# Altium PCB ET-master.PcbDoc (part 2 of 2)
Units mil, origin at the board's own origin, x right, y up, seen from the top; angles counter-clockwise.
Board outline 6299 x 3937 mil, 4 copper layers (TopLayer, agnd, power, BottomLayer); 134 components, 185 nets, 734 pads, 100 vias.
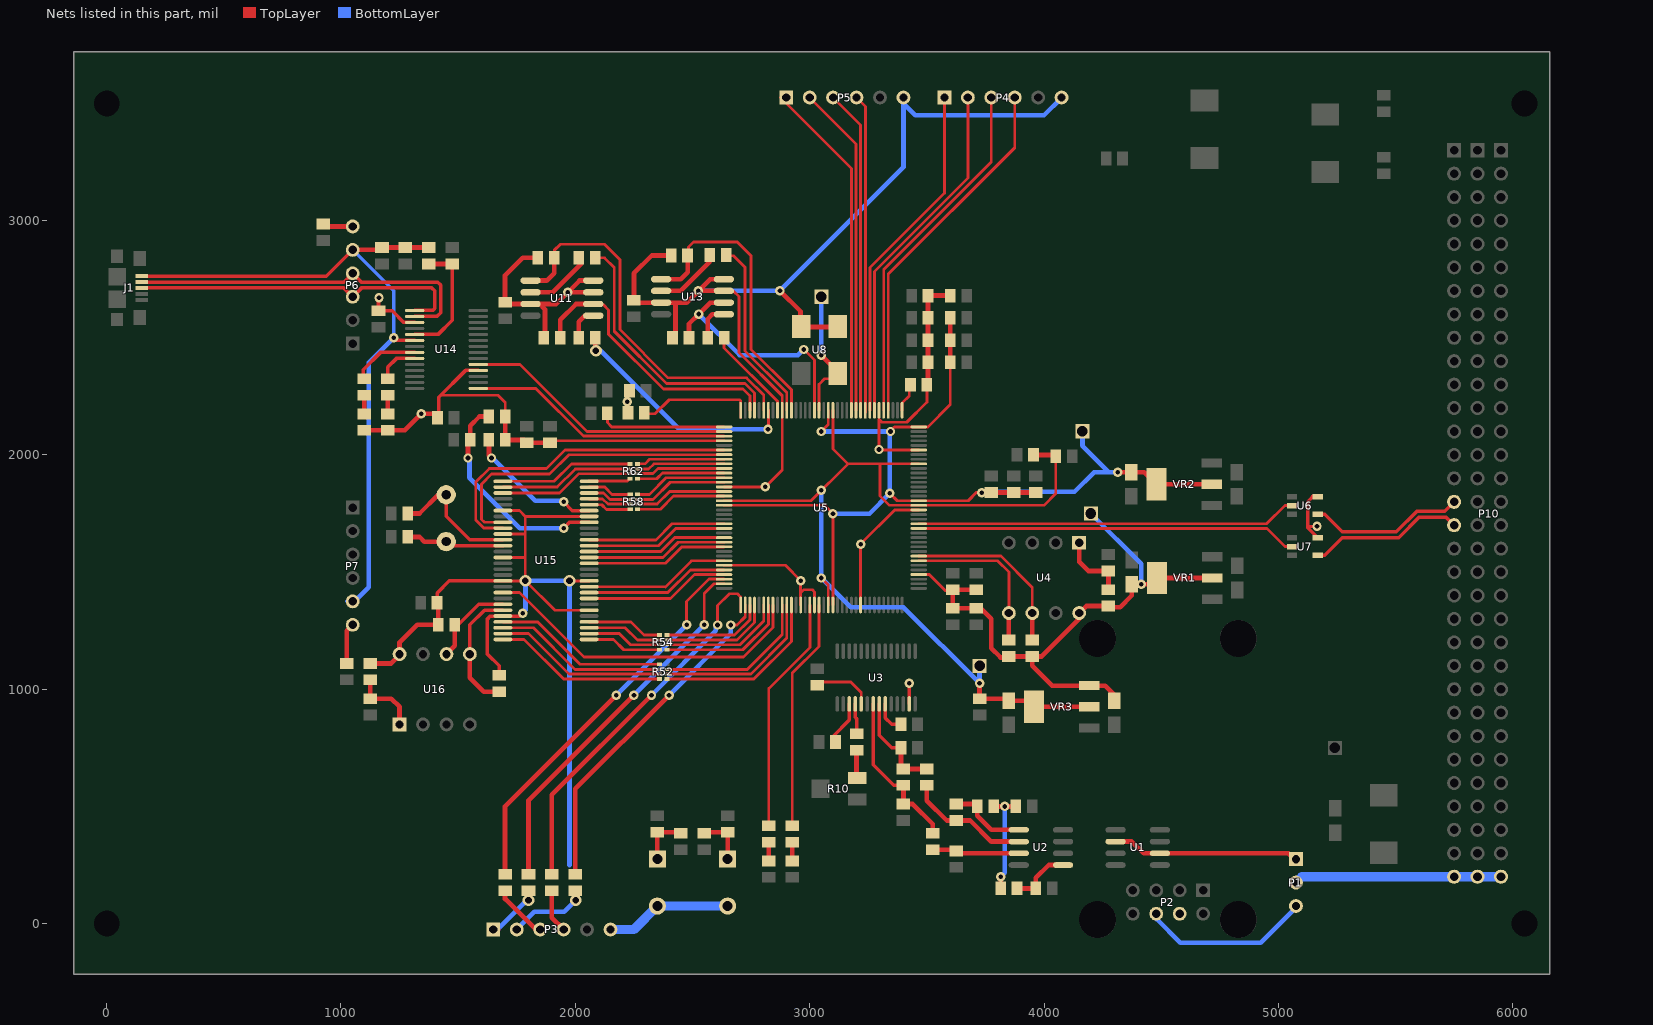
[diagram p4: the nets of this part, all layers, seen from the top]

## Via types
v1: diameter 40, hole 20, TopLayer to BottomLayer, 89 vias
v2: diameter 50, hole 28, TopLayer to BottomLayer, 10 vias
v3: diameter 40, hole 22, TopLayer to BottomLayer, 1 vias

## Nets (pads, with @x,y where several pads share a name; then routed paths per layer and width w, separated by ;. In a path a pad name is that pad's centre, name@x,y a point inside that pad or via, vN(x,y) a via of type N, cw(c..) or ccw(c..) an arc to the next point about the centre after c; other vN are vias at no path point) (continued)
FD1: R52.3 U5.118 | length 679.5
  TopLayer w12: R52.3@2390.75,1084.84 2733.84,1084.84 2882.68,1233.68 U5.118@2882.68,1359.65
FD2: R52.2 U5.119 | length 716.4
  TopLayer w12: R52.2@2390.75,1065.16 2749.16,1065.16 2902.36,1218.36 U5.119@2902.36,1359.65
FD3: R52.1 U5.120 | length 753.4
  TopLayer w12: R52.1@2390.75,1043.5 2761.5,1043.5 2922.05,1204.05 U5.120@2922.05,1359.65
FD4: R54.1 U5.115 | length 560.1
  TopLayer w12: R54.1@2390.75,1168.5 2714.5,1168.5 2823.62,1277.62 U5.115@2823.62,1359.65
FD5: R54.2 U5.114 | length 523.1
  TopLayer w12: R54.2@2390.75,1190.16 2702.16,1190.16 2803.94,1291.94 U5.114@2803.94,1359.65
FD6: R54.3 U5.112 | length 479.8
  TopLayer w12: R54.3@2390.75,1209.84 2689.84,1209.84 2764.57,1284.57 U5.112@2764.57,1359.65
FD7: R54.4 U5.111 | length 444
  TopLayer w12: R54.4@2390.75,1231.5 2679.5,1231.5 2744.88,1296.88 U5.111@2744.88,1359.65
FD8: R58.1 U5.88 | length 392.2
  TopLayer w12: R58.1@2265.75,1768 2363,1768 2419.21,1824.21 U5.88@2634.65,1824.21
FD9: R58.2 U5.87 | length 391.2
  TopLayer w12: R58.2@2265.75,1790.16 2349.16,1790.16 2402.9,1843.9 U5.87@2634.65,1843.9
FD10: R58.3 U5.85 | length 399.3
  TopLayer w12: R58.3@2265.75,1809.84 2331.84,1809.84 2405.27,1883.27 U5.85@2634.65,1883.27
FD11: R58.4 U5.84 | length 398.7
  TopLayer w12: R58.4@2265.75,1831 2316,1831 2387.95,1902.95 U5.84@2634.65,1902.95
FD12: R62.1 U5.83 | length 379.9
  TopLayer w12: R62.1@2264.75,1898.5 2347.5,1898.5 2371.64,1922.64 U5.83@2634.65,1922.64
FD13: R62.4 U5.80 | length 378.1
  TopLayer w12: R62.4@2264.75,1962 2297,1962 2316.69,1981.69 U5.80@2634.65,1981.69
FD14: R62.3 U5.81 | length 378.1
  TopLayer w12: R62.3@2265.75,1939.84 2312.84,1939.84 2335.01,1962.01 U5.81@2634.65,1962.01
FD15: R62.2 U5.82 | length 379.1
  TopLayer w12: R62.2@2264.75,1920.16 2331.16,1920.16 2353.32,1942.32 U5.82@2634.65,1942.32
FIFOAD0: U5.97 U15.44 | length 600.3
  TopLayer w12: U15.44@2059.06,1587.5 2364.5,1587.5 2424.05,1647.05 U5.97@2634.65,1647.05
FIFOAD1: U5.95 U15.45 | length 606.2
  TopLayer w12: U15.45@2059.06,1612.5 2354.5,1612.5 2428.42,1686.42 U5.95@2634.65,1686.42
FLAGA: U5.105 U15.36 | length 617.9
  TopLayer w12: U15.36@2059.06,1387.5 2406.5,1387.5 2508.57,1489.57 U5.105@2634.65,1489.57
FLAGB: U5.104 U15.37 | length 615.7
  TopLayer w12: U15.37@2059.06,1412.5 2394.5,1412.5 2491.25,1509.25 U5.104@2634.65,1509.25
FLAGC: U5.102 U15.38 | length 621.6
  TopLayer w12: U15.38@2059.06,1437.5 2383.5,1437.5 ; 2384.5,1436.5 2495.62,1547.62 ; 2494.62,1548.62 U5.102@2634.65,1548.62
GCLK: pad.0@3050,2675 U5.55 U8.3 | length 536.8
  TopLayer w12: U5.55@3040.16,2190.35 3040.16,2301.16 3064,2325 U8.3@3100,2325
  TopLayer w20: v1(3050,2425) 3120.74,2354.26 U8.3@3120.74,2348
  BottomLayer w20: v1(3050,2425) pad.0@3050,2675
GCLK_N: P10.C17 U7.4 | length 664.1
  TopLayer w15: U7.4@5168.13,1571.58 5198,1571.58 5273,1646.58 5513.36,1646.58 5601.77,1735 5715,1735 P10.C17@5750,1700
GCLK_P: P10.C16 U6.4 | length 666.1
  TopLayer w15: U6.4@5168.13,1746.58 5198,1746.58 5273,1671.58 5503,1671.58 5591.42,1760 5710,1760 P10.C16@5750,1800
GCLKOUT_N: U5.14 U7.2 | length 1605.4
  TopLayer w12: U5.14@3485,1686.42 4950,1686.42 ; 4949.58,1686.42 4950,1686 4950.98,1686 5028,1608.98 U7.2@5057.9,1608.98
GCLKOUT_P: U5.15 U6.2 | length 1624.8
  TopLayer w12: U5.15@3465.35,1706.1 4950.12,1706.1 5028,1783.98 U6.2@5057.9,1783.98
IFCLK: U5.116 U15.20 | length 1415.1
  TopLayer w12: U15.20@1690.94,1412.5 1761.5,1412.5 2037,1137 2717,1137 2843.31,1263.31 U5.116@2843.31,1359.65
J1: P4.4 U5.40 | length 1558.3
  TopLayer w12: U5.40@3335,2190.35 3335,2771 3875,3311 P4.4@3875,3525
J2: P4.3 U5.41 | length 1524.8
  TopLayer w12: U5.41@3316,2190.35 3316,2791 3775,3250 P4.3@3775,3525
J3: P4.2 U5.43 | length 1499.9
  TopLayer w12: U5.43@3276,2190.35 3276,2783 3675,3182 P4.2@3675,3525
J4: P4.1 U5.44 | length 1466.4
  TopLayer w12: U5.44@3257,2190.35 3257,2799 3575,3117 P4.1@3575,3525
J5: P5.4 U5.45 | length 1358.2
  TopLayer w12: P5.4@3200,3525 3237.64,3487.36 U5.45@3237.64,2182.35
J6: P5.3 U5.46 | length 1383.1
  TopLayer w12: P5.3@3100,3525 3217,3408 U5.46@3217,2190.35
J7: P5.2 U5.47 | length 1416.7
  TopLayer w12: P5.2@3000,3525 3198,3327 U5.47@3198,2190.35
J8: P5.1 U5.48 | length 1460.2
  TopLayer w12: P5.1@2875,3525 3178,3222 U5.48@3177.95,2190.35
LED1: R31.1 U5.126 | length 985.5
  TopLayer w12: R31.1@2925.75,421.55 2925.75,1068.75 3040.16,1183.16 U5.126@3040.16,1359.65
LED2: R32.1 U5.124 | length 1014.8
  TopLayer w12: R32.1@2825.75,417.35 2825.75,1003.75 3000.79,1178.79 U5.124@3000.79,1359.65
NetC1_1: C1.1 R4.2 R5.2 | length 452.1
  TopLayer w20: R4.2@3785.04,500 v1(3832.48,500) C1.1@3879.92,500 ; R5.2@3814.96,150 v1(3814.96,200)
  BottomLayer w20: v1(3814.96,200) 3832.48,217.52 v1(3832.48,500)
NetC2_1: C2.1 R6.1 R8.2 U3.21 | length 705.6
  TopLayer w15: U3.21@3271.2,937.8 3271.2,677.22 3358.46,589.96 C2.1@3400,589.96
  TopLayer w20: C2.1@3400,589.96 R8.2@3400,510.04 3439.96,510.04 3525,425 R6.1@3525,385.04
NetC2_2: C2.2 R2.1 R3.1 U3.22 | length 429.7
  TopLayer w15: U3.22@3296.8,937.8 3296.8,803.2 3350,750 R2.1@3389.96,750
  TopLayer w20: C2.2@3389.96,670.08 R2.1@3389.96,750 ; C2.2@3400,660.04 R3.1@3500,660.04
NetC3_1: C3.1 R5.1 U2.5 | length 264
  TopLayer w20: R5.1@3885.04,150 C3.1@3964.96,150 3964.96,194.76 4020.2,250 U2.5@4081.42,250
NetC4_2: C4.2 U3.17 | length 166.3
  TopLayer w15: C4.2@3100,800 3168.84,868.84 U3.17@3168.84,937.8
NetC5_1: C5.1 U3.19 | length 257.9
  TopLayer w12: C5.1@3029,1031 3175,1031 3220.02,985.98 U3.19@3220.02,937.8
NetC6_2: C6.2 U3.23 | length 139.2
  TopLayer w15: U3.23@3322.39,937.8 3322.39,877.61 3350,850 C6.2@3389.96,850
NetC53_1: C53.1 R46.2 U15.49 | length 925.7
  TopLayer w15: v1(1950,1687.5) 1950,1700 1956.25,1693.75 1975,1712.5 U15.49@2059.06,1712.5
  TopLayer w20: v1(1542,1987) C53.1@1542,2049 ; C53.1@1551.04,2064 1551.04,2124.04 1591,2164 R46.2@1630.96,2164
  BottomLayer w20: v1@1548,1987 1548,1903 1763.5,1687.5 v1(1950,1687.5)
NetC54_1: C54.1 U15.12 Y1.1 | length 417
  TopLayer w15: Y1.1@1449,1630 1467.5,1611.5 U15.12@1692.94,1611.5
  TopLayer w20: C54.1@1284.25,1665.75 C54.1@1292.32,1665.75 ; C54.1@1300,1650 1335.04,1650 1355.04,1630 Y1.1@1449,1630
NetC55_1: C55.1 U15.11 Y1.2 | length 568.4
  TopLayer w15: Y1.2@1449,1830 1449,1738 1549.5,1637.5 U15.11@1690.94,1637.5
  TopLayer w20: C55.1@1289.35,1750 1335.04,1750 1415.04,1830 Y1.2@1449,1830
NetD2_A: D2.A R31.2 | length 79.9
  TopLayer w20: D2.A@2925.75,267.35 R31.2@2925.75,347.28
NetD3_A: D3.A R32.2 | length 79.9
  TopLayer w20: D3.A@2825.75,267.35 R32.2@2825.75,347.28
NetD4_A: D4.A R42.1 | length 79.9
  TopLayer w20: R42.1@1099.61,2177.89 D4.A@1099.61,2257.81
NetD4_K: D4.K U14.22 | length 291.2
  TopLayer w12: D4.K@1095.21,2331.2 D4.K@1101.61,2324.8
  TopLayer w15: D4.K@1095.21,2331.2 1095.21,2364.11 1168.31,2437.2 U14.22@1314.17,2437.2
NetD5_A: D5.A R43.1 | length 79.9
  TopLayer w20: R43.1@1199.61,2174.8 D5.A@1199.61,2254.72
NetD5_K: D5.K U14.23 | length 174.2
  TopLayer w15: D5.K@1199.61,2324.8 1199.61,2369.64 ; 1200,2375 1236.61,2411.61 U14.23@1314.17,2411.61
NetP1_1: P1.1 U1.2 U1.6 | length 853.5
  TopLayer w20: U1.2@4305.51,350 4375,350 4425,300 U1.6@4525,300 ; U1.6@4475,300 5043,300 P1.1@5075,268
NetP3_1: P3.1 R29.1 | length 223.7
  TopLayer w20: P3.1@1650,-25 P3.1@1669.69,-25
  BottomLayer w20: P3.1@1650,-25 1669.69,-25 v2@1800,105.31
  other v2: 1800,100
NetP3_2: P3.2 R28.1 | length 303.8
  BottomLayer w20: P3.2@1750,-25 1825,50 1952,50 v2(2002,100)
NetP3_3: P3.3 R27.1 | length 238.6
  TopLayer w20: R27.1@1700,139.96 1700,105.32 1830.32,-25 P3.3@1850,-25
NetP3_4: P3.4 R26.1 | length 181.5
  TopLayer w20: R26.1@1900,135.76 1900,25 P3.4@1950,-25
NetP6_6: P6.6 R63.1 | length 110
  TopLayer w20: R63.1@939.96,2975 P6.6@1050,2975
NetP7_6: P7.6 R68.1 | length 175.3
  TopLayer w20: R68.1@1025,1110.04 1025,1250 P7.6@1050,1275
NetR1_1: R1.1 R3.2 U2.2 | length 529.9
  TopLayer w20: R3.2@3500,589.96 3500,525 3585.04,439.96 R1.1@3625,439.96 3685.04,439.96 3775,350 U2.2@3892.44,350
NetR1_2: R1.2 R4.1 U2.1 | length 322.2
  TopLayer w20: R1.2@3625,510.04 R4.1@3704.92,510.04 ; R4.1@3714.96,500 3714.96,460.04 3775,400 U2.1@3892.44,400
NetR6_2: R6.2 R9.2 U2.3 | length 352.5
  TopLayer w20: R6.2@3525,314.96 R9.2@3620.08,314.96 ; R9.2@3635.04,300 U2.3@3892.44,300
NetR7_1: R7.1 U3.18 | length 140.1
  TopLayer w15: U3.18@3194.43,937.8 3194.43,880.57 3200,875 R7.1@3200,800
NetR7_2: R7.2 R10.CCW | length 110.5
  TopLayer w20: R10.CCW@3199.61,625 R7.2@3199.61,735.5
NetR12_1: R12.1 R16.2 U4.1 | length 302.6
  TopLayer w20: U4.1@4150,1625 4150,1543.16 4188.24,1504.92 R16.2@4275,1504.92 R12.1@4275,1425
NetR13_1: R13.1 U11.2 | length 291.7
  TopLayer w20: U11.2@1808.84,2694 1903,2694 2025,2816 R13.1@2025,2841
NetR15_1: R15.1 U11.5 | length 124.4
  TopLayer w20: R15.1@2014.96,2516 2014.96,2568.03 2040.93,2594 U11.5@2076.56,2594
NetR20_1: R20.1 U13.2 | length 288.2
  TopLayer w20: U13.2@2366.14,2700 2450,2700 2573.96,2823.96 R20.1@2573.96,2853
NetR22_1: R22.1 U13.5 | length 157.2
  TopLayer w20: R22.1@2564.96,2500 2564.96,2579.96 2585,2600 U13.5@2633.86,2600
NetR25_2: R25.2 U5.73 | length 545.5
  TopLayer w12: R25.2@2136.61,2178 2136.61,2138.39 2155.51,2119.49 U5.73@2634.65,2119.49
NetR30_2: R30.2 U5.72 | length 532.9
  TopLayer w12: R30.2@2300,2176 2341,2176 2400.63,2235.63 2700,2235.63 2705.51,2230.12 U5.72@2705.51,2190.35 ; U5.72@2705.51,2158.86 U5.72@2705.51,2190.35 ; U5.72@2705.51,2219.49 U5.72@2705.51,2190.35
NetR33_2: R33.2 R34.2 S1.1 | length 215
  TopLayer w20: R33.2@2550,389.96 R34.2@2650,389.96 S1.1@2650,275
NetR35_2: R35.2 R36.2 S2.1 | length 215
  TopLayer w20: S2.1@2350,275 R36.2@2350,389.96 R35.2@2450,389.96
NetR44_2: R44.2 R45.1 U14.19 | length 526.1
  TopLayer w15: U14.19@1314.17,2513.98 1413.98,2513.98 1475,2575 R44.2@1475,2814.96
  TopLayer w20: R45.1@1375,2814.96 R44.2@1475,2814.96
NetR52_5: R52.5 U15.25 | length 743.3
  TopLayer w12: U15.25@1690.94,1287.5 1839.5,1287.5 2020.5,1106.5 R52.5@2359.25,1106.5
NetR52_6: R52.6 U15.26 | length 741.9
  TopLayer w12: U15.26@1690.94,1262.5 1821.5,1262.5 1999.16,1084.84 R52.6@2359.25,1084.84
NetR52_7: R52.7 U15.27 | length 739.7
  TopLayer w12: U15.27@1690.94,1237.5 1800.5,1237.5 1972.84,1065.16 R52.7@2359.25,1065.16
NetR52_8: R52.8 U15.28 | length 738.3
  TopLayer w12: U15.28@1690.94,1212.5 1781.5,1212.5 1950.5,1043.5 R52.8@2359.25,1043.5
NetR54_5: R54.5 U15.32 | length 323.4
  TopLayer w12: U15.32@2059.06,1287.5 2237.5,1287.5 2293.5,1231.5 R54.5@2359.25,1231.5
NetR54_6: R54.6 U15.31 | length 334.5
  TopLayer w12: U15.31@2059.06,1262.5 2212.5,1262.5 ; 2200,1262.5 2212.5,1262.5 ; R54.6@2359.25,1209.84 2265.16,1209.84 2212.5,1262.5
NetR54_7: R54.7 U15.30 | length 319.8
  TopLayer w12: U15.30@2059.06,1237.5 2187.5,1237.5 2234.84,1190.16 R54.7@2359.25,1190.16
NetR54_8: R54.8 U15.29 | length 318.4
  TopLayer w12: U15.29@2059.06,1212.5 2162.5,1212.5 2206.5,1168.5 R54.8@2359.25,1168.5
NetR58_5: R58.5 U15.55 | length 188
  TopLayer w12: U15.55@2059.06,1862.5 2125.5,1862.5 2156.5,1831.5 R58.5@2234.25,1831.5
NetR58_6: R58.6 U15.54 | length 184.4
  TopLayer w12: U15.54@2059.06,1837.5 2120.5,1837.5 2148.16,1809.84 R58.6@2232,1809.84
NetR58_7: R58.7 U15.53 | length 184.2
  TopLayer w12: U15.53@2059.06,1812.5 2116.5,1812.5 2138.84,1790.16 R58.7@2234,1790.16
NetR58_8: R58.8 U15.52 | length 183.4
  TopLayer w12: U15.52@2059.06,1787.5 2112.5,1787.5 2133,1767 R58.8@2234,1767
NetR62_5: R62.5 U15.1 | length 573
  TopLayer w12: U15.1@1690.94,1887.5 1909.5,1887.5 1983.5,1961.5 R62.5@2233.25,1961.5
NetR62_6: R62.6 U15.2 | length 576.4
  TopLayer w12: U15.2@1690.94,1862.5 1922.5,1862.5 2000,1940 R62.6@2235.25,1940
NetR62_7: R62.7 U15.3 | length 578.5
  TopLayer w12: U15.3@1690.94,1837.5 1932.5,1837.5 2015,1920 R62.7@2235.25,1920
NetR62_8: R62.8 U15.56 | length 180.3
  TopLayer w12: U15.56@2057.06,1888.5 2223.25,1888.5 R62.8@2233.25,1898.5
NetR69_2: R69.2 U15.51 | length 565.5
  TopLayer w15: v1(1950,1800) 1987.5,1762.5 U15.51@2059.06,1762.5
  TopLayer w20: R69.2@1631.96,2064 1631.96,1997.04 v1(1642,1987)
  BottomLayer w20: v1@1646,1988 1829,1805 1930,1805
NetR70_1: R70.1 R71.2 U16.1 | length 294.4
  TopLayer w20: R70.1@1125,1039.96 R71.2@1125,960.04 1214.96,960.04 1250,925 U16.1@1250,850
PKTEND: U5.94 U15.46 | length 604
  TopLayer w12: U15.46@2059.06,1637.5 2344.5,1637.5 2413.1,1706.1 U5.94@2634.65,1706.1
PROG: R23.1 U5.37 | length 122.3
  TopLayer w12: U5.37@3394.49,2190.35 3394.49,2221.36 3425,2251.87 R23.1@3425,2300
RDY0: U5.79 U15.8 | length 1332.9
  TopLayer w12: U15.8@1690.94,1712.5 1612.5,1712.5 1600,1725 1600,1875 1643,1918 1890,1918 1972.86,2000.86 U5.79@2634.65,2000.86
RDY1: U5.78 U15.9 | length 1408.8
  TopLayer w12: U15.9@1690.94,1687.5 1609.22,1687.5 1575,1721.72 1575,1884 1633,1942 1877,1942 1956.06,2021.06 U5.78@2634.65,2021.06
SCL: R67.1 U15.22 U16.6 | length 366.7
  TopLayer w15: R67.1@1500,1275 1587.5,1362.5 U15.22@1690.94,1362.5
  TopLayer w20: U16.6@1450,1150 1485.04,1185.04 R67.1@1485.04,1275
SCL1: R17.1 U4.6 U5.8 | length 789.7
  TopLayer w12: U5.8@3465.35,1568.31 3815.69,1568.31 3950,1434 U4.6@3950,1325 U4.6@3957,1300
  TopLayer w20: R17.1@3950,1210.57 U4.6@3950,1325
SDA: R66.1 U15.23 U16.5 | length 541.7
  TopLayer w15: U16.5@1550,1150 1550,1275 1612.5,1337.5 U15.23@1690.94,1337.5
  TopLayer w20: U16.5@1550,1150 1550,1050 1610.04,989.96 R66.1@1675,989.96
SDA1: R18.1 U4.5 U5.7 | length 694.2
  TopLayer w12: U5.7@3465.35,1548.62 3801.38,1548.62 3850,1500 U4.5@3850,1325
  TopLayer w20: R18.1@3850,1210.57 U4.5@3850,1325
SLOE: U5.99 U15.42 | length 604.5
  TopLayer w12: U15.42@2059.06,1537.5 2384.5,1537.5 2454.36,1607.36 U5.99@2634.65,1607.36
SPI_CS1: R14.1 U5.67 U11.1 | length 1622.1
  TopLayer w12: R14.1@1910.04,2841 1910.04,2873.09 1935.95,2899 2124,2899 2190,2833 2190,2535 2396,2329 2730,2329 2803.94,2255.06 U5.67@2803.94,2190.35
  TopLayer w20: U11.1@1808.84,2744 1878,2744 1910.04,2776.04 R14.1@1910.04,2841
SPI_CS2: R21.1 U5.61 U13.1 | length 1264.3
  TopLayer w12: R21.1@2483.24,2851 2483.24,2887.28 2504.95,2909 2691,2909 2750,2850 2750,2450 2922.05,2277.95 U5.61@2922.05,2190.35
  TopLayer w20: U13.1@2366.14,2750 2450,2750 2479.04,2779.04 R21.1@2479.04,2851
SPI_MISO1: R13.2 U5.69 | length 1147.3
  TopLayer w12: R13.2@2089.5,2841 2125,2841 2166,2800 2166,2528 2389,2305 2724,2305 2764.57,2264.43 U5.69@2764.57,2190.35
SPI_MISO2: R20.2 U5.62 | length 784.8
  TopLayer w12: R20.2@2644.04,2850 2675,2850 2724,2801 2724,2444 2902.36,2265.64 U5.62@2902.36,2190.35
SPI_MOSI1: R15.2 U5.66 | length 1022.6
  TopLayer w12: v1@2823.62,2109 U5.66@2823.62,2190.35
  TopLayer w20: v2@2085.04,2447.96 R15.2@2085.04,2516
  BottomLayer w20: v2(2088,2445) 2108,2445 2444,2109 v1(2822,2109)
SPI_MOSI2: R22.2 U5.64 | length 404.1
  TopLayer w12: R22.2@2635.04,2500 2635.04,2456.96 2862.99,2229.01 U5.64@2862.99,2190.35
SPI_SCLK1: R11.1 U5.70 U11.6 | length 1208.4
  TopLayer w12: U11.6@2050,2641 2120,2641 2142,2619 2142,2515 2376,2281 2716,2281 2744.88,2252.12 U5.70@2744.88,2190.35
  TopLayer w20: R11.1@1935.04,2516 1935.04,2576.04 2003,2644 U11.6@2076.56,2644
SPI_SCLK2: R19.1 U5.56 U13.6 | length 1054.7
  TopLayer w12: v1(2975,2450) 3020.47,2404.53 U5.56@3020.47,2190.35
  TopLayer w20: R19.1@2485.04,2500 2485.04,2560.04 v1(2526,2601) 2575,2650 U13.6@2633.86,2650
  BottomLayer w20: v1(2526,2601) 2700.5,2426.5 ; 2702,2425 2950,2425 v1(2975,2450)
TCK: R26.2 U5.109 | length 1634.9
  TopLayer w12: v1@2608,1275 v1(2607,1274) 2607,1357 2657.83,1407.83 2692,1407.83 2705.51,1394.31 U5.109@2705.51,1359.65 U5.109@2705.51,1330.51
  TopLayer w20: R26.2@1900,210.04 1900,550 v1(2325,975)
  BottomLayer w20: v1(2325,975) 2599,1249 2599,1274 v1(2607,1274)
TDI: R28.2 U5.110 | length 1465.8
  TopLayer w12: v1(2663,1274) 2690,1274 2725.2,1309.2 U5.110@2725.2,1359.65
  TopLayer w20: R28.2@2000,210.04 2000,575 v1(2400,975)
  BottomLayer w20: v1(2400,975) 2663,1238 v1(2663,1274)
TDO: R27.2 U5.106 | length 1684.9
  TopLayer w12: v1(2475,1275) 2475,1375 2569.88,1469.88 U5.106@2634.65,1469.88
  TopLayer w20: R27.2@1700,210.04 1700,500 v1(2175,975)
  BottomLayer w20: v1(2175,975) v1(2475,1275)
TMS: R29.2 U5.107 | length 1611.3
  TopLayer w12: v1(2550,1275) 2550,1409 2591.2,1450.2 U5.107@2634.65,1450.2
  TopLayer w20: R29.2@1800,210.04 1800,525 v1(2250,975)
  BottomLayer w20: v1(2250,975) v1(2550,1275)
UART_RX: U5.75 U14.1 | length 1158.1
  TopLayer w12: U14.1@1560.83,2283.66 1831.34,2283.66 2034.88,2080.12 U5.75@2634.65,2080.12
UART_TX: U5.74 U14.5 | length 1192.4
  TopLayer w12: U14.5@1560.83,2386.02 1763.98,2386.02 2050.2,2099.8 U5.74@2634.65,2099.8
USB5V0: C50.2 C51.2 J1.1 P6.5 P7.5 R45.2 U14.20 | length 3026
  TopLayer w15: J1.1@150,2762.18 937.18,2762.18 P6.5@1050,2875 ; v1(1225,2500) 1236.61,2488.39 U14.20@1314.17,2488.39
  TopLayer w20: P6.5@1050,2875 C50.2@1160.04,2875 ; C50.2@1175,2885.04 C51.2@1275,2885.04 R45.2@1375,2885.04
  BottomLayer w15: P7.5@1025,1375 P7.5@1059,1375 ; P6.5@1050,2875 1225,2700 v1(1225,2500)
  BottomLayer w20: P7.5@1059,1375 1119,1435 1119,2394 v1(1225,2500)
USBD_N: J1.2 P6.4 U14.16 | length 1547
  TopLayer w15: J1.2@150,2737.5 1012.5,2737.5 P6.4@1050,2775 1087.5,2737.5 1412.5,2737.5 1425,2725 1425,2606.69 1409.06,2590.75 U14.16@1314.17,2590.75
USBD_P: J1.3 P6.3 U14.15 | length 1450.7
  TopLayer w15: J1.3@150,2712.5 1012.5,2712.5 P6.3@1050,2675 1087.5,2712.5 1387.5,2712.5 1400,2700 1400,2625 1391.34,2616.34 U14.15@1314.17,2616.34
VCCAUX: C9.2 C10.2 C11.2 C12.2 C13.2 C24.2 C43.1 pad.0@4164,2101 U5.20 U5.36 U5.53 U5.90 U5.129 VR2.2 | length 4359.3
  TopLayer w12: U5.90@2634.65,1784.84 3065.16,1784.84 v1@3100,1750 ; v1(3050,2100) 3079.53,2129.53 U5.53@3079.53,2190.35 ; U5.129@3099.21,1359.65 v1(3099.21,1749.21) ; v1(3342,1836) 3373.47,1804.53 U5.20@3465.35,1804.53 3676.53,1804.53 3710.96,1838.96 C11.2@3775,1838.96 ; 3358.5,2116.5 3361.49,2119.49 U5.36@3465.35,2119.49 3504.49,2119.49 3600,2215 C10.2@3599.96,2395
  TopLayer w20: C10.2@3599.96,2395 C9.2@3599.96,2490 C24.2@3599.96,2585 ; C11.2@3775,1839.96 C13.2@3870,1839.96 C12.2@3965,1839.96 ; v1(4315,1926.57) C43.1@4372.83,1926.57 4428.15,1926.57 VR2.2@4479.72,1875 VR2.2@4715.94,1875
  BottomLayer w20: v1(3050,2100) 3342,2100 v1(3342,1836) 3255.21,1749.21 v1(3099.21,1749.21) ; v1@3743,1843 4130,1843 4213.57,1926.57 v1(4315,1926.57) ; pad.0@4164,2101 4164,2039.14 4276.57,1926.57
  other v1: 3734.25,1839.17 3345,2100
VCCINT: C33.2 C34.2 C35.2 C45.1 pad.1@3725,1100 U5.19 U5.28 U5.52 U5.89 U5.128 VR3.2 | length 4256.1
  TopLayer w12: U5.89@2634.65,1804.53 3005.51,1804.53 3162.99,1962.01 ; v1(3050,1475) 3079.53,1445.47 U5.128@3079.53,1359.65 ; U5.52@3099.21,2190.35 3099.21,2025.79 3162.99,1962.01 ; U5.28@3465.35,1962.01 3300,1962.01 ; C35.2@4049.96,1995 4049.96,1834.92 3999.88,1784.84 U5.19@3465.35,1784.84 3340.16,1784.84 3300,1825 3300,1962.01 ; 3162.99,1962.01 3300,1962.01
  TopLayer w20: v1(3725,1025) C33.2@3725,960.04 C45.1@3841.54,960.04 ; C45.1@3850,951.57 VR3.2@3930.31,951.57 ; C34.2@3955.04,2000 C35.2@4039.96,2000 ; VR3.2@3956.89,925 VR3.2@4193.11,925
  BottomLayer w20: v1(3050,1849.02) v1(3050,1475) 3175,1350 3400,1350 v1(3725,1025) pad.1@3725,1100
VCCO: C7.2 C8.2 C27.2 C28.2 C29.1 C31.2 C32.2 C37.2 C38.2 C40.2 C41.2 C42.2 C44.1 C49.1 C52.2 C56.1 C57.1 C58.1 P3.6 P4.6 P5.6 pad.2@4200,1750 R11.2 R12.2 R14.2 R17.2 R18.2 R19.2 R21.2 R23.2 R24.2 R30.1 R42.2 R43.2 R46.1 R66.2 R67.2 R69.1 R70.2 S1.2 S2.2 U3.27 U4.8 U5.4 U5.18 U5.31 U5.42 U5.63 U5.76 U5.86 U5.103 U5.122 U5.125 U5.135 U6.5 U7.5 U8.1 U8.4 U11.3 U11.7 U11.8 U13.3 U13.7 U13.8 U14.4 U14.17 U15.6 U15.10 U15.14 U15.18 U15.24 U15.34 U15.39 U15.50 U16.8 VR1.2 VR3.3 | length 17765.8
  TopLayer w12: 1426,2255 1669,2255 1701.04,2222.96 R46.1@1701.04,2164 ; U15.18@1690.94,1462.5 v2@1786.5,1462.5 ; U15.14@1690.94,1562.5 1781,1562.5 ; U15.10@1690.94,1662.5 1785,1662.5 ; U15.6@1690.94,1762.5 1761.5,1762.5 1786.5,1737.5 ; C58.1@1889,2060.43 U5.76@2634.65,2060.43 ; v2(1975,1462.5) U15.39@2059.06,1462.5 ; U15.34@2059.06,1337.5 1912,1337.5 v2(1787,1462.5) v2@1786.5,1462.5 ; U15.50@2059.06,1737.5 1786.5,1737.5 ; U13.7@2633.86,2700 2674,2700 2698,2676 2698,2437 2882.68,2252.32 U5.63@2882.68,2190.35 2882.68,1935.68 v1(2810.58,1863.58) U5.86@2634.65,1863.58 ; U5.103@2634.65,1528.94 2896.06,1528.94 v1(2961.42,1463.58) 2961.42,1411.42 ; U5.122@2961.42,1359.65 2961.42,1411.42 ; U5.125@3020.47,1359.65 3020.47,1415.35 3010.83,1425 2975,1425 2961.42,1411.42 ; U5.135@3217.32,1359.65 v1(3217.32,1619.32) 3363.16,1765.16 U5.18@3465.35,1765.16 ; U5.4@3465.35,1489.57 3510.43,1489.57 3579.39,1420.61 C42.2@3611,1420.61 ; U5.31@3465.35,2021.06 3296.06,2021.06 3296.06,2152.36 3309.25,2139.17 3414.17,2139.17 3500.04,2225.04 R23.2@3500.04,2300 ; 5127.5,1695 v1(5165,1695) ; v2@1786.5,1462.5 1786.5,1737.5
  TopLayer w15: v1@1160,2669 C49.1@1160,2615.04 1218.43,2615.04 1268.31,2565.16 U14.17@1314.17,2565.16 ; U16.8@1250,1145.08 U16.8@1250,1150 ; C57.1@1410.65,1375 1410.65,1410.65 1462.5,1462.5 U15.18@1690.94,1462.5 ; C52.2@1417,2175 1417,2246 1531.43,2360.43 U14.4@1585.83,2360.43 ; R66.2@1675,1050 1675,1100 1625,1150 1625,1300 1637.5,1312.5 U15.24@1690.94,1312.5 1762.5,1312.5 v1(1775,1325) ; U3.27@3425,938.05 v1(3425,1025) ; 5146.39,1821.39 5125.5,1800.5 5125.5,1689.02 U7.5@5168.13,1646.39
  TopLayer w20: R42.2@1107.75,2105.83 1272.83,2105.83 v1(1342,2175) C52.2@1417,2175 ; R70.2@1125,1110.04 1214.96,1110.04 U16.8@1250,1145.08 ; U16.8@1250,1150 1250,1200 1325,1275 R67.2@1414.96,1275 C57.1@1414.96,1375 ; C52.2@1401.96,2162 C52.2@1408.96,2162 ; R46.1@1701.04,2153.96 R69.1@1701.04,2064 C56.1@1780.96,2064 ; C56.1@1792,2051.96 C58.1@1892,2051.96 ; R14.2@1839.96,2841 1775,2841 1700,2766 C7.2@1700,2651.04 1700,2644 U11.3@1808.84,2644 U11.3@1847,2644 ; R11.2@1864.96,2516 1870.15,2521.19 1870.15,2620.85 U11.3@1847,2644 ; v1(1967.7,2694) U11.7@2076.56,2694 ; U11.8@2076.56,2744 2017.7,2744 1917.7,2644 U11.3@1847,2644 ; R30.1@2221.57,2181.96 v1(2221.57,2227) ; C8.2@2250,2660.04 2250,2775 2326,2851 R21.2@2404.5,2851 ; C8.2@2260.04,2650 U13.3@2366.14,2650 2475,2650 2575,2750 U13.8@2633.86,2750 ; R19.2@2414.96,2500 2427.45,2512.49 2427.45,2647.55 ; v1(2525,2700) U13.7@2633.86,2700 ; v1(2873,2700) 2961,2612 2961,2546 U8.4@3120.74,2546 ; R23.2@3505.04,2305 C32.2@3505.04,2395 C31.2@3505.04,2490 C38.2@3505.04,2585 C27.2@3505.04,2680 C41.2@3599.96,2680 ; C37.2@3711,1424.96 C42.2@3611,1424.96 C28.2@3611,1345.04 C40.2@3711,1345.04 3729.96,1345.04 3775,1300 3775,1175 3814.37,1135.63 R18.2@3849.6,1135.63 ; R18.2@3849.6,1140.1 R17.2@3949.6,1140.1 ; R12.2@4275,1350.46 4325.46,1350.46 4375,1400 C29.1@4375,1448.43 v1(4415.16,1448.43) VR1.2@4455.31,1448.43 ; R12.2@4275,1354.92 4179.92,1354.92 U4.8@4150,1325 4150,1300 3990.1,1140.1 R17.2@3949.6,1140.1 ; C44.1@4300,951.57 4300,976.93 4261.38,1015.55 VR3.3@4193.11,1015.55 4034.45,1015.55 3950,1100 3950,1139.7 R17.2@3949.6,1140.1 ; VR1.2@4481.89,1475 VR1.2@4718.11,1475 ; 5146.39,1821.39 U6.5@5168.13,1821.39
  BottomLayer w12: v1(1775,1325) v1@1787,1337
  BottomLayer w20: v1@1787,1337 v2(1787,1462.5) v2(1975,1462.5) 1975,250 ; v1(2525,2700) v1(2873,2700) 3400,3227 P5.6@3400,3525 3400,3500 3450,3450 4000,3450 P4.6@4075,3525 ; pad.2@4200,1750 4415.16,1534.84 v1(4415.16,1448.43)
  BottomLayer w40: P3.6@2150,-25 2250,-25 S2.2@2350,75 S1.2@2650,75
  other v1: 3296.06,2023 1162,2671
VE: P1.2 P10.A32 P10.B32 P10.C32 | length 885.4
  BottomLayer w40: P1.2@5075,175 5100,200 P10.C32@5750,200 P10.B32@5850,200 P10.A32@5950,200
VO+: P1.3 P2.6 | length 715.1
  BottomLayer w20: P2.6@4480,35.75 4480,20 4582,-82 4925,-82 P1.3@5075,68
VO-: P2.4
WU2: U5.98 U15.43 | length 602.5
  TopLayer w12: U15.43@2059.06,1562.5 2374.5,1562.5 2439.36,1627.36 U5.98@2634.65,1627.36
pads on no net: J1.4 P10.A16 P10.A17 P10.A20 P10.A21 P10.A22 P10.A23 P10.A25 P10.A26 P10.A27 P10.A28 P10.B4 P10.B5 P10.B6 P10.B7 P10.B8 P10.B9 P10.B10 P10.B11 P10.B16 P10.B17 P10.B18 P10.B19 P10.B20 P10.B21 P10.B22 P10.B23 P10.B25 P10.B26 P10.B27 P10.B28 P10.C20 P10.C21 P10.C22 P10.C23 P10.C25 P10.C26 P10.C27 P10.C28 U1.1 U1.5 U1.8 U3.25 U5.5 U5.6 U5.9 U5.10 U5.11 U5.12 U5.50 U5.51 U5.57 U5.58 U5.59 U5.60 U5.65 U5.92 U6.1 U7.1 U14.2 U14.3 U14.6 U14.8 U14.9 U14.10 U14.11 U14.12 U14.13 U14.14 U14.24 U14.27 U14.28 U15.5

## Polygon pours and split planes (outlines as drawn)
AGND on TopLayer "Bottom Layer-No Net" (solid, remove dead copper, pour order 8): -119.9,3699.9 6138.9,3699.9 6138.9,-196.9 -119.9,-196.9 -119.9,3699.9
AGND on BottomLayer "Bottom Layer-No Net" (solid, remove dead copper, pour order 10): -119.9,3699.9 6138.9,3699.9 6138.9,-196.9 -119.9,-196.9 -119.9,3699.9
DGND on agnd (split plane): 4154.9,2647 4155.29,2643.08 4156.43,2639.31 4158.29,2635.83 4160.79,2632.79 4904.9,1888.68 4904.9,746.1 3401,746.1 3397.08,745.71 3393.31,744.57 3389.83,742.71 3386.79,740.21 2591.68,-54.9 1170.1,-54.9 1170.1,1216.68 1885.21,1931.79 1887.71,1934.83 1889.57,1938.31 1890.71,1942.08 1891.1,1946 1891.1,3699.9 4154.9,3699.9
AGND on agnd (split plane): 6138.9,-196.9 -119.9,-196.9 -119.9,3699.9 1850.9,3699.9 1850.9,1954.32 1135.79,1239.21 1133.29,1236.17 1131.43,1232.69 1130.29,1228.92 1129.9,1225 1129.9,-75 1130.29,-78.92 1131.43,-82.69 1133.29,-86.17 1135.79,-89.21 1138.83,-91.71 1142.31,-93.57 1146.08,-94.71 1150,-95.1 2600,-95.1 2603.92,-94.71 2607.69,-93.57 2611.17,-91.71 2614.21,-89.21 3409.32,705.9 4925,705.9 4928.92,706.29 4932.69,707.43 4936.17,709.29 4939.21,711.79 4941.71,714.83 4943.57,718.31 4944.71,722.08 4945.1,726 4945.1,1897 4944.71,1900.92 4943.57,1904.69 4941.71,1908.17 4939.21,1911.21 4195.1,2655.32 4195.1,3699.9 6138.9,3699.9
+5V on power (split plane): 4921.92,1703 4922.23,1699.08 4923.15,1695.25 4924.66,1691.62 4926.71,1688.26 4929.27,1685.27 5790.27,824.27 5793.26,821.71 5796.62,819.66 5798.12,819.03 5800.25,818.15 5803.16,817.45 5804.08,817.23 5808,816.92 6138.9,816.92 6138.9,312.08 5545.13,312.08 4951.48,905.73 4948.48,908.29 4945.13,910.34 4941.49,911.85 4937.67,912.77 4933.74,913.08 4353.08,913.08 4353.08,2097.92 4921.92,2097.92
+12V on power (split plane): 6009.93,365.07 5690.07,365.07 5690.07,434.93 6009.93,434.93
-12V on power (split plane): 4949.92,164 4949.92,-186.92 3800.08,-186.92 3800.08,274.92 4949.92,274.92
+12V on power (split plane): 4949.92,325.08 3800.08,325.08 3800.08,659.92 4949.92,659.92
VCCO on power (split plane): 6138.9,867.08 5818.39,867.08 4972.08,1713.39 4972.08,2123 4971.77,2126.92 4970.85,2130.75 4969.34,2134.38 4967.29,2137.74 4964.73,2140.73 4961.74,2143.29 4958.38,2145.34 4954.75,2146.85 4950.92,2147.77 4947,2148.08 4328,2148.08 4324.08,2147.77 4320.25,2146.85 4316.62,2145.34 4313.26,2143.29 4310.27,2140.73 4307.71,2137.74 4305.66,2134.38 4304.15,2130.75 4303.23,2126.92 4302.92,2123 4302.92,888 4303.23,884.08 4304.15,880.25 4305.66,876.62 4307.71,873.26 4310.27,870.27 4313.26,867.71 4316.62,865.66 4320.25,864.15 4324.08,863.23 4328,862.92 4923.36,862.92 5517.01,269.27 5520,266.71 5521.3,265.92 5523.36,264.66 5524.86,264.03 5526.99,263.15 5529.9,262.45 5530.82,262.23 5534.74,261.92 6138.9,261.92 6138.9,-196.9 5000.08,-196.9 5000.08,164 5000.08,300 5000.08,685 4999.77,688.92 4998.85,692.75 4997.34,696.38 4995.29,699.74 4992.73,702.73 4989.74,705.29 4986.38,707.34 4982.75,708.85 4978.92,709.77 4975,710.08 3775,710.08 3771.08,709.77 3767.25,708.85 3763.62,707.34 3760.26,705.29 3757.27,702.73 3754.71,699.74 3752.66,696.38 3751.15,692.75 3750.23,688.92 3749.92,685 3749.92,300 3749.92,-196.9 -119.9,-196.9 -119.9,3699.9 6138.9,3699.9

## Other copper
TopLayer:
  text ".GTL" at 5859,3870 h40
BottomLayer:
  text "P/N XXXXXX-XXX REV A" at 1180,3920 h40
  text ".GBL" at 5859,3870 h40
agnd (plane layer: these items are gaps in the copper):
  lines w40: 1150,-75 2600,-75 3401,726 4925,726 4925,1897 4175,2647 4175,3720 1871,3720 1871,1946 1150,1225 1150,-75
power (plane layer: these items are gaps in the copper):
  lines w30: 625,3720 6159,3720 6159,3250 ; 5675,350 5675,450 6025,450 6025,350 5675,350
  lines w50: 4007,300 3775,300 ; 6141,287 5534.74,287 4933.74,888 4328,888 4328,2123 4947,2123 4947,1703 5808,842 6150,842 ; 3775,300 3775,685 4975,685 4975,300 ; 3775,300 4975,300 ; 3775,300 3775,-212 4975,-212 4975,164 4975,300

## Silkscreen, mask and mechanical layers (free items; w line width, h text height)
TopOverlay:
  circle w10: c0,0 r112.5
  circle w10: c0,3500 r112.5
  lines w8: 100,-98 5950,-98 5950,102 6100,102 6100,3402 5950,3402 5950,3602 100,3602 100,3402 -75,3402 -75,102 100,102
  lines w10: 1252.59,4515.97 ccw(c1301,4555.5) 1252.71,4515.83
  text "C" at 1356,4518 h40
  text "2002 COMPANY NAME" at 1506,4518 h40
  text "BOARD NAME" at 1356,4343 h40
  text "ASSY NO.: XXXXXX" at 1356,4193 h40
  text ".GTO" at 5859,3870 h40
  text "+12V" at 5600,3525 h40
  text "J8" at 2875,3450 h40 r270
  text "J7" at 2975,3450 h40 r270
  text "J6" at 3075,3450 h40 r270
  text "J5" at 3175,3450 h40 r270
  text "DGND" at 3275,3450 h40 r270
  text "VCCO" at 3375,3450 h40 r270
  text "J4" at 3550,3450 h40 r270
  text "J3" at 3650,3450 h40 r270
  text "J2" at 3750,3450 h40 r270
  text "J1" at 3850,3450 h40 r270
  text "DGND" at 3950,3450 h40 r270
  text "VCCO" at 4050,3450 h40 r270
  text "SPI_CS1=P67" at 1725,3175 h40
  text "SPI_CS2=P61" at 2400,3175 h40
  text "J5=P45" at 3100,3150 h40
  text "J1=P40" at 3600,3150 h40
  text "-12V" at 5310,3110 h40
  text "UART_TX=P74" at 1125,3100 h40
  text "SPI_SCLK1=P70" at 1725,3100 h40
  text "SPI_SCLK2=P56" at 2400,3100 h40
  text "J6=P46" at 3100,3075 h40
  text "J2=P41" at 3600,3075 h40
  text "UART_RX=P75" at 1125,3025 h40
  text "SPI_MISO1=P69" at 1725,3025 h40
  text "SPI_MISO2=P62" at 2400,3025 h40
  text "J7=P47" at 3100,3000 h40
  text "J3=P43" at 3600,3000 h40
  text "SPI_MOSI1=P66" at 1725,2950 h40
  text "SPI_MOSI2=P64" at 2400,2950 h40
  text "J8=P48" at 3100,2925 h40
  text "J4=P44" at 3600,2925 h40
  text "D0=P39" at 5025,2907 h40
  text "D8=P27" at 5325,2907 h40
  text "V/RED" at 675,2850 h40
  text "D1=P38" at 5025,2831 h40
  text "D9=P26" at 5325,2831 h40
  text "D2=P35" at 5025,2755 h40
  text "D10=P24" at 5325,2755 h40
  text "D-/WHITE" at 700,2750 h40
  text "GCLK=P55" at 2900,2725 h40
  text "D3=P34" at 5025,2679 h40
  text "D11=P23" at 5325,2679 h40
  text "D+/GREEN" at 675,2650 h40
  text "D4=P33" at 5025,2603 h40
  text "D12=P22" at 5325,2603 h40
  text "GND/BLACK" at 650,2550 h40
  text "D5=P32" at 5025,2527 h40
  text "D13=P21" at 5325,2527 h40
  text "D14=P17" at 5325,2451 h40
  text "GND/GRAY" at 650,2450 h40
  text "D6=P30" at 5030,2450 h40
  text "D7=P29" at 5025,2375 h40
  text "D15=P16" at 5325,2375 h40
  text "FD0=P117" at 0,2300 h40
  text "FD8=P88" at 350,2300 h40
  text "FD1=P118" at 0,2225 h40
  text "FD9=P87" at 350,2225 h40
  text "FD2=P119" at 0,2150 h40
  text "FD10=P85" at 350,2150 h40
  text "2.5V" at 4098,2146 h40
  text "FD3=P120" at 0,2075 h40
  text "FD11=P84" at 350,2075 h40
  text "VR2-2.5V" at 4450,2033 h40
  text "FD4=P115" at 0,2000 h40
  text "FD12=P83" at 350,2000 h40
  text "FD5=P114" at 0,1925 h40
  text "FD13=P80" at 350,1925 h40
  text "GCLKOUT_P=P15" at 5200,1900 h40
  text "FD6=P112" at 0,1850 h40
  text "FD14=P81" at 350,1850 h40
  text "GCLKOUT_N=P14" at 5200,1825 h40
  text "3.3V" at 4100,1800 h40
  text "FD7=P111" at 0,1775 h40
  text "FD15=P82" at 350,1775 h40
  text "GND/GRAY" at 675,1750 h40
  text "P1" at 6075,1750 h40 r90
  text "AT24C128N" at 3800,1686.42 h40
  text "GND/BLACK" at 650,1650 h40
  text "VR1-3.3V" at 4446,1624 h40
  text "INT0#=P101" at 0,1600 h40
  text "D+/GREEN" at 675,1550 h40
  text "INT1#=P100" at 0,1525 h40
  text "SLOE=99" at 0,1450 h40
  text "D-/WHITE" at 675,1450 h40
  text "WU2=P98" at 0,1375 h40
  text "V/RED" at 800,1350 h40
  text "SDA1=P7" at 4950,1325 h40
  text "FIFOAD0=P97" at 0,1300 h40
  text "SCL1=P8" at 4950,1250 h40
  text "FIFOAD1=P95" at 0,1225 h40
  text "PKTEND=P94" at 0,1150 h40
  text "1.2V" at 3650,1150 h40
  text "SLCS#=P93" at 0,1075 h40
  text "VR3-1.2V" at 4009,1069 h40
  text "RDY0=P79" at 0,1000 h40
  text "RDY1=P78" at 0,925 h40
  text "FLAGA=P105" at 0,800 h40
  text "AT24C128N" at 1225,750 h40
  text "FLAGB=P104" at 0,725 h40
  text "+5V" at 5300,725 h40
  text "S/N" at 7441,722.08 h40
  text "FLAGC=P102" at 0,650 h40
  text "DO0=P127" at 600,475 h40
  text "DO7=P139" at 950,475 h40
  text "REV" at 7441,424.58 h40
  text "DO1=P131" at 600,400 h40
  text "DO8=P140" at 950,400 h40
  text "DO2=P132" at 600,325 h40
  text "DO9=P141" at 950,325 h40
  text "DO3=P133" at 600,250 h40
  text "DO10=P142" at 950,250 h40
  text "DGND" at 2050,200 h40 r270
  text "VCCO" at 2150,200 h40 r270
  text "DO4=P134" at 600,175 h40
  text "DO11=P143" at 950,175 h40
  text "LED1=P126" at 3125,175 h40
  text "DO5=P137" at 600,100 h40
  text "DO12=P144" at 950,100 h40
  text "LED2=P124" at 3125,100 h40
  text "LED2" at 2725,50 h40
  text "LED1" at 2900,50 h40
  text "DO6=P138" at 600,25 h40
  text "DO13=P1" at 950,25 h40
  text "BTN1=P123" at 3125,25 h40
  text "BTN1" at 2555,-45 h40
  text "BTN2" at 2280,-48 h40
  text "BTN2=P121" at 3125,-50 h40
  text "DACLK=P2" at 600,-75 h40
  text "JTAG" at 1425,-75 h40
TopPaste:
  text ".GTP" at 5859,3870 h40
BottomPaste:
  text ".GBP" at 5859,3870 h40
TopSolder:
  text ".GTS" at 5859,3870 h40
BottomSolder:
  text ".GBS" at 5859,3870 h40
Mechanical1:
  the board outline again, w20
Mechanical4:
  text ".Pcb_File_Name_No_Path" at 3959,4060 h40
  text ".Printout_Name" at 3959,3870 h40

## Dimensions
0,-237 to -140,-217 on Mechanical4
-160,0 to -140,-217 on Mechanical4

## Text inside footprints (layer, text, board x,y; h text height)
P2: TopOverlay "8" at 4299,32 h40; TopOverlay "7" at 4299,122 h40; TopOverlay "1" at 4749,122 h40; TopOverlay "2" at 4749,22 h40
P10: TopOverlay "C" at 5737.5,3350 h60; TopOverlay "B" at 5812.5,3350 h60; TopOverlay "A" at 5887.5,3350 h60; TopOverlay "C" at 5737.5,87.5 h60; TopOverlay "B" at 5825,87.5 h60; TopOverlay "A" at 5900,87.5 h60; TopOverlay "32" at 6100,150 h40 r90; TopOverlay "1" at 6100,3287.5 h40 r90